# Altium PCB 下层功率板.PcbDoc
Units mm, origin at the board's own origin, x right, y up, seen from the top; angles counter-clockwise.
Board outline 70 x 50 mm, 2 copper layers (Top Layer, Bottom Layer); 12 components, 4 nets, 48 pads, 0 vias.
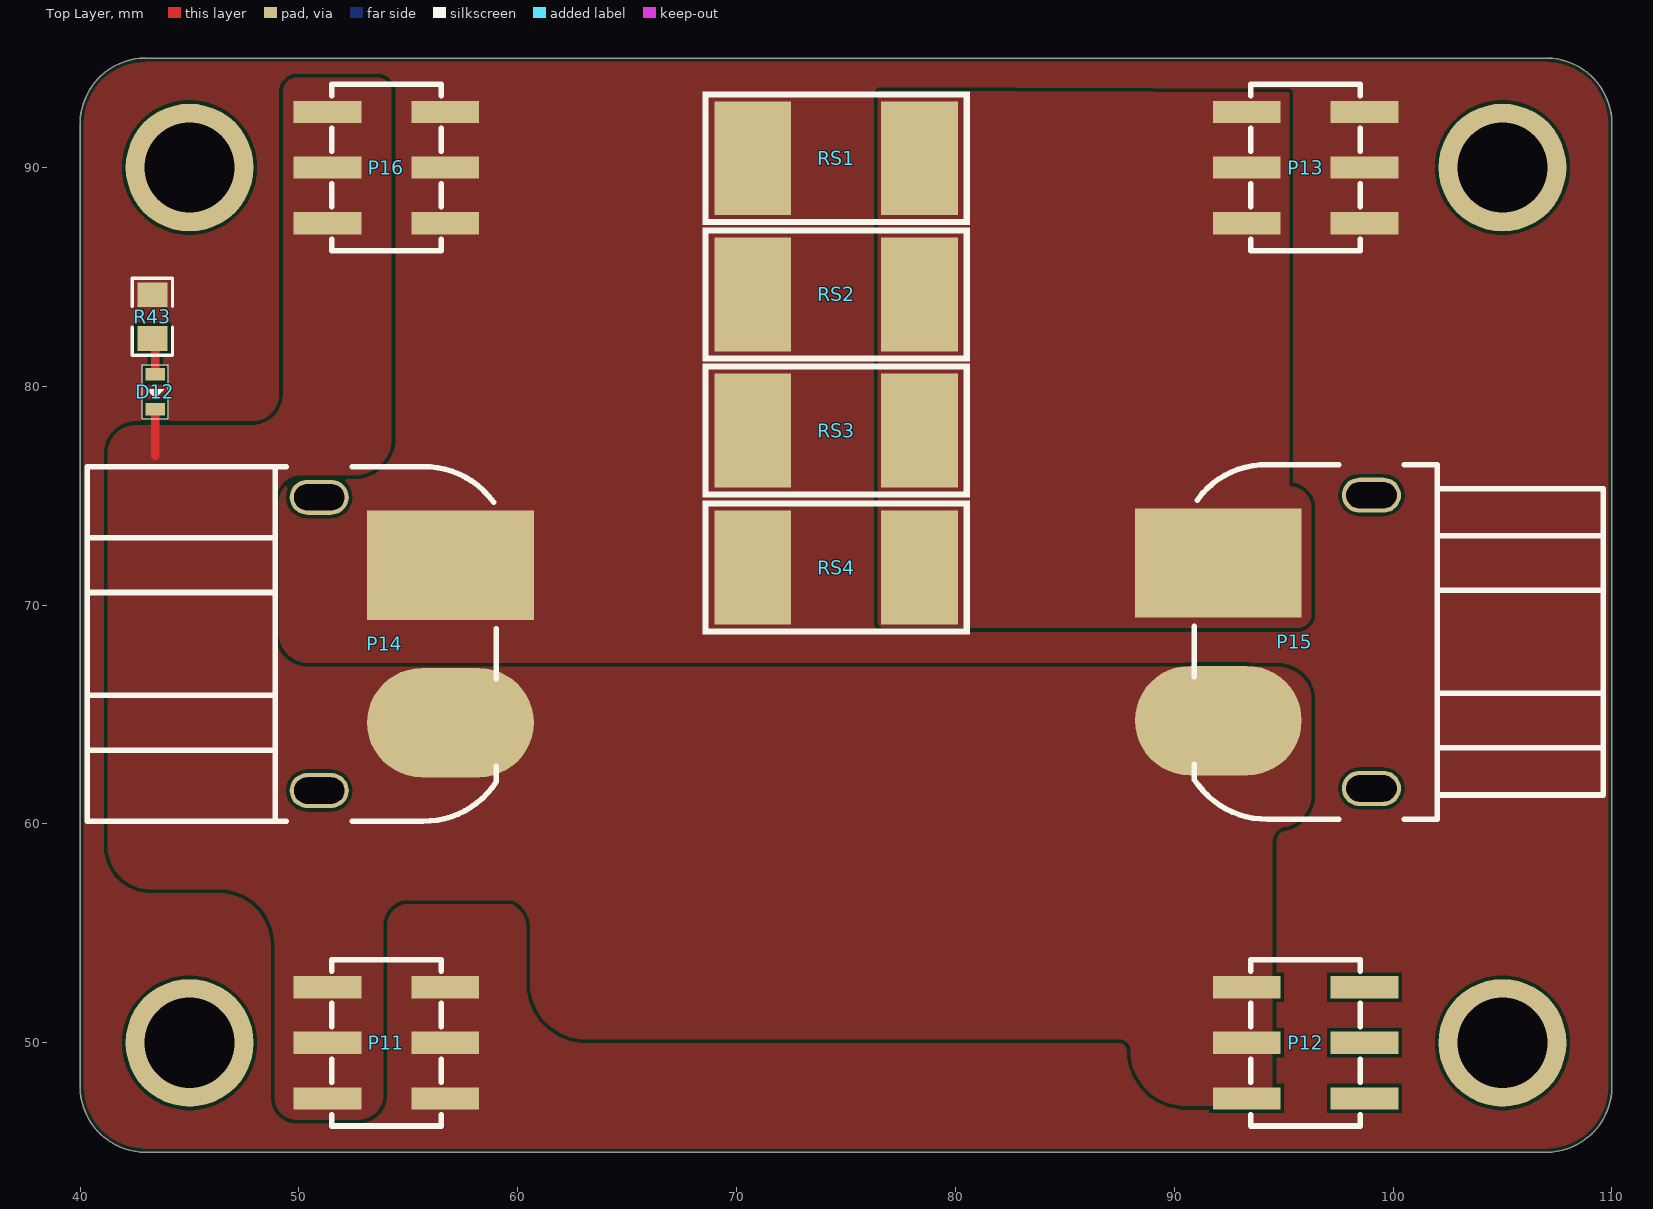
[diagram p0: Top Layer view]
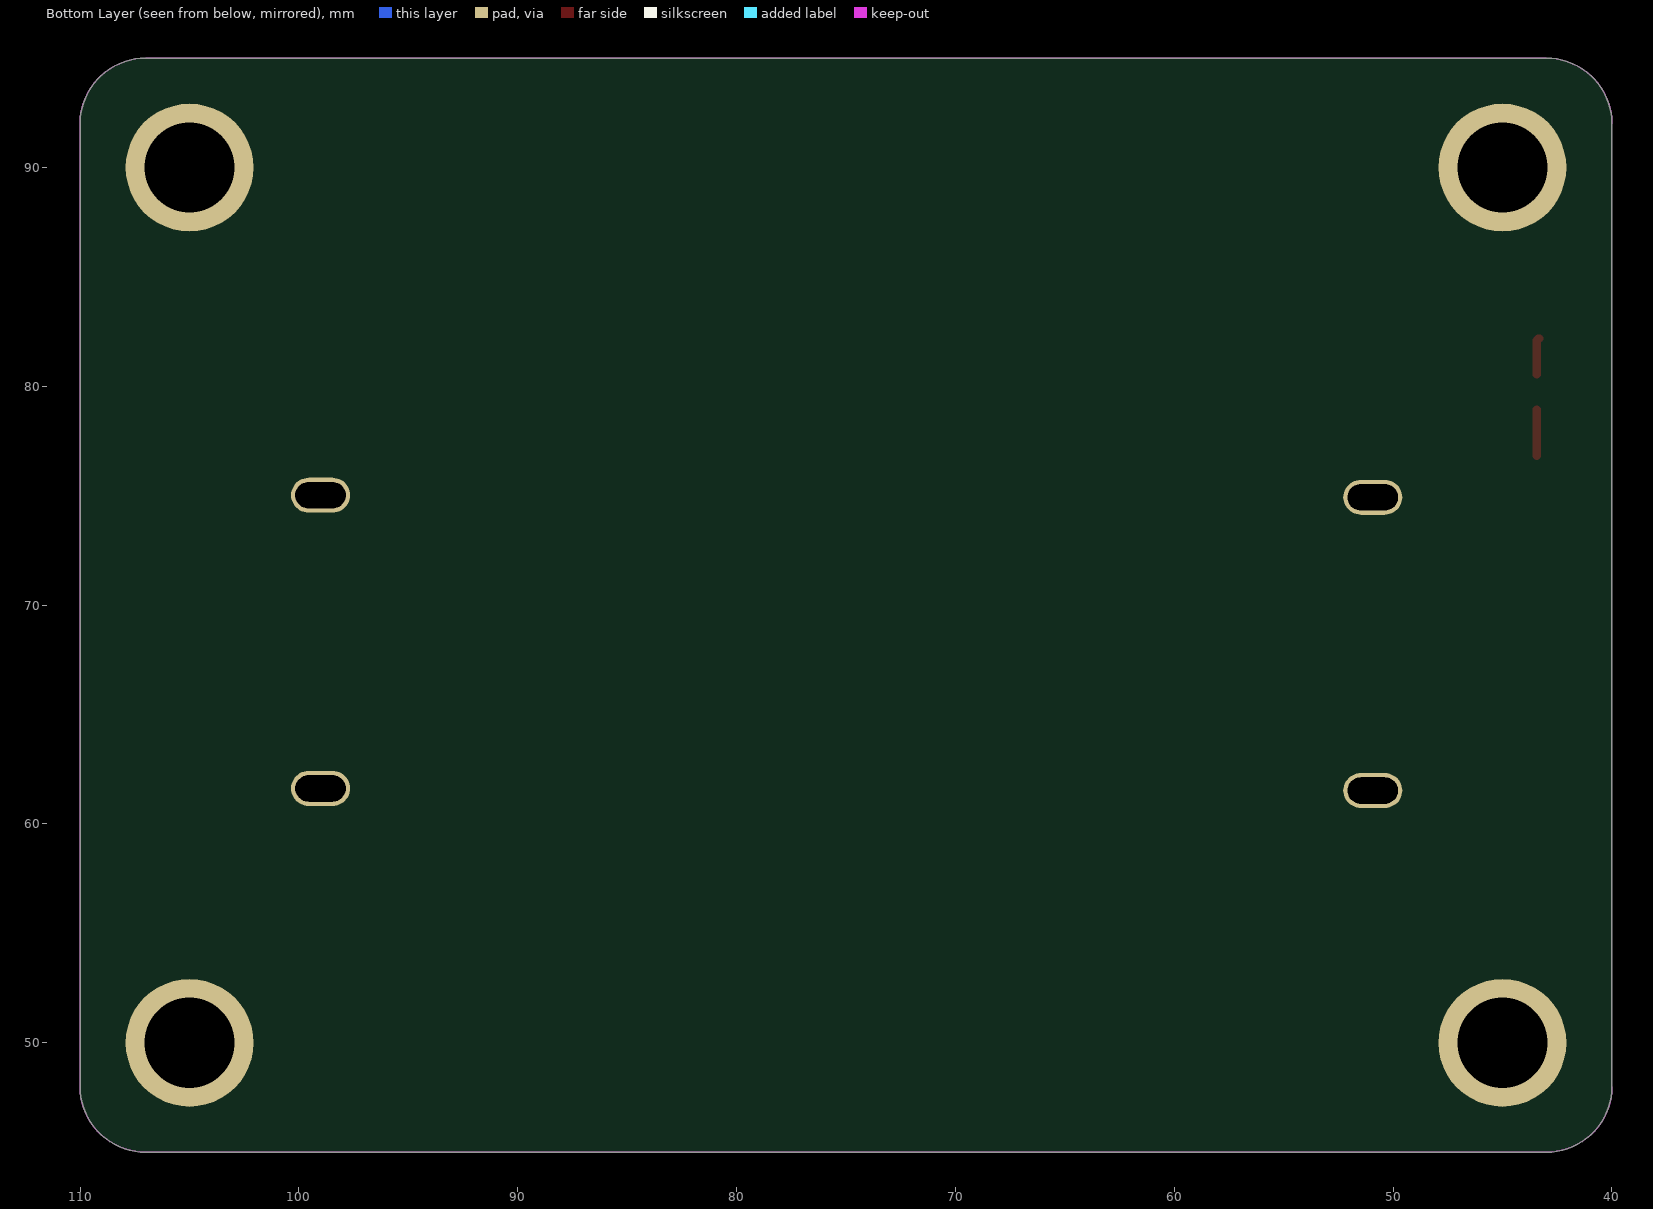
[diagram p1: Bottom Layer view, seen from below]
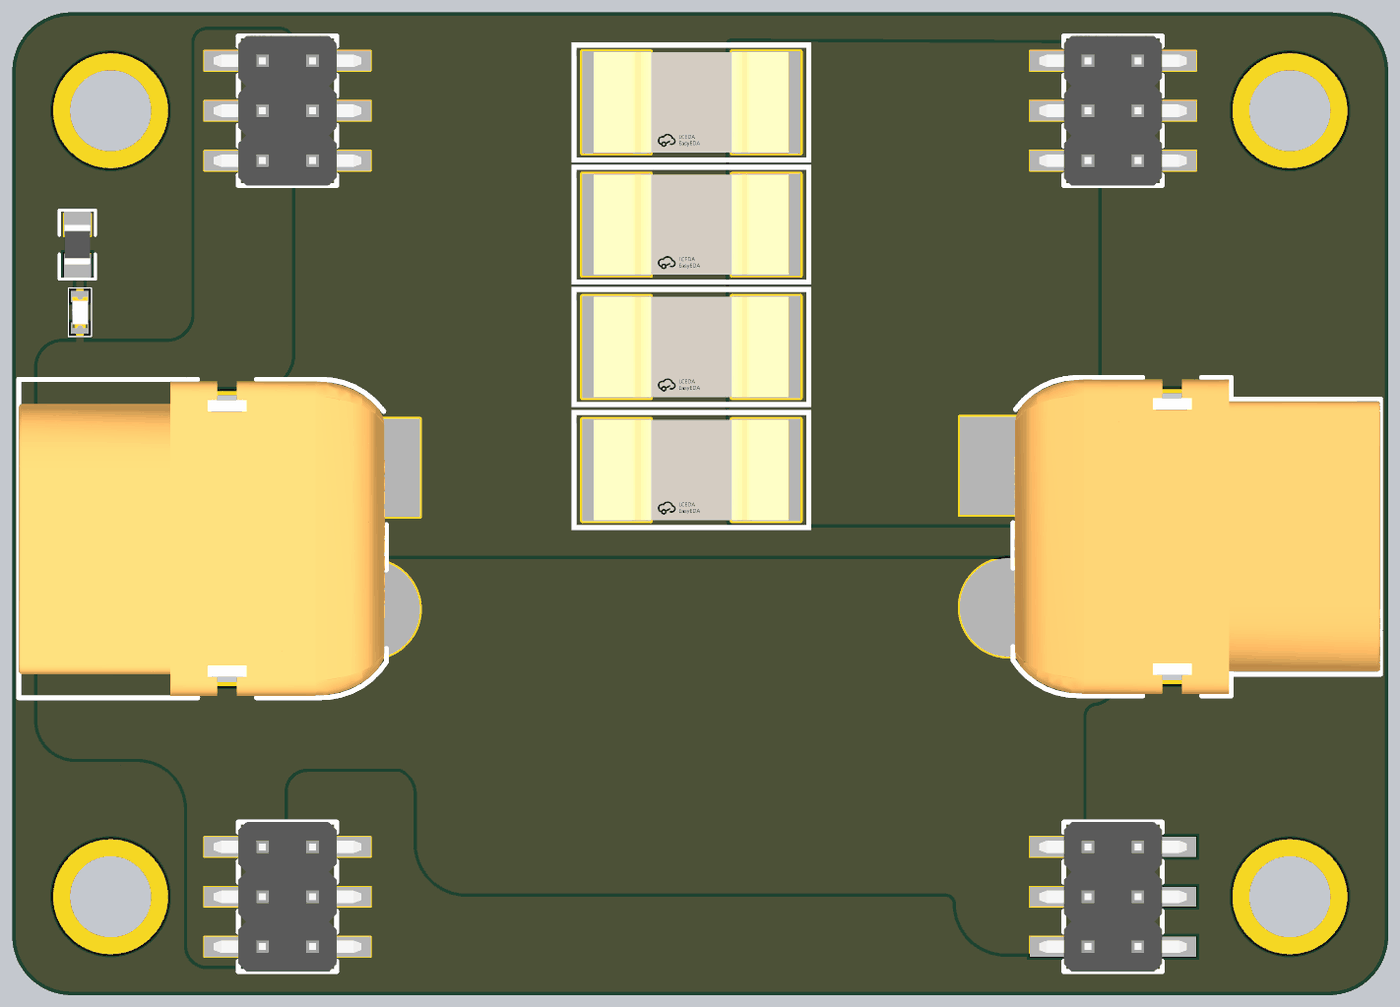
[diagram p2: 3D render of the assembled board from above, using the file's embedded part models]

## Layer stack, top to bottom
Top Solder: solder mask 0.0102, Solder Resist, Dk 3.5
Top Layer: signal copper 0.0356
Dielectric 1: dielectric 0.32, FR-4, Dk 4.8
Bottom Layer: signal copper 0.0356
Bottom Solder: solder mask 0.0102, Solder Resist, Dk 3.5

## Board outline
40,48 40,92 cw(c43,92) 43,95 107,95 cw(c107,92) 110,92 110,48 cw(c107,48) 107,45 43,45 cw(c43,48)

## Design rules (kind name [scope] priority, off if disabled: settings)
Clearance [All] p1: gap=0.152 ignorepadtopadclearanceinfootprint=FALSE except(0: Arc-Hole Track-Hole SMDPad-Hole THPad-Hole Via-Hole Fill-Hole Poly-Hole Region-Hole Text-Hole)
ComponentClearance [All] p1: gap=0 collisioncheckmode=3 verticalgap=0 showdistances=FALSE
HoleSize [All] p1: absolutevalues=TRUE maxlimit=12.7 minlimit=0.025 maxpercent=80.000 minpercent=20.000
HoleToHoleClearance [All] p1: gap=0 allowstackedmicrovias=TRUE
MinimumSolderMaskSliver [All] p1: minsoldermaskwidth=0
PolygonConnect [All] p1: connectstyle=Direct reliefconductorwidth=0.254 reliefentries=4 polygonreliefangle="90 Angle" airgapwidth=0.254
RoutingVias [All] p1: holewidth=0.711 width=1.27 viastyle="Through Hole" minholewidth=0.711 minwidth=1.27 maxholewidth=0.711 maxwidth=1.27
SilkToSilkClearance [All] p1: silktosilkclearance=0
SilkToSolderMaskClearance [IsPad] p1: minsilkscreentomaskgap=0 clearancetoexposedcopper=TRUE
SolderMaskExpansion [All] p1: expansion=0.102 istentingtop=FALSE
Width [All] p1: maxlimit=12.7 minlimit=0.203 preferedwidth=0.508 minimp=50.000000 maximp=50.000000 favimp=50.000000
24 further rules are at their usual default settings.

## Components (designator, comment, footprint, x,y, rotation, side; value= is the part's Value field where it differs from the comment)
D12 "LED_BLUE" LED-0603W 43.307,79.883 r270 top
P11 "Header 3X2" HDR-SMD_6P-P2.54-V-M-R2-C3-LS7.5-2 54,50 r90 top locked
P12 "Header 3X2" HDR-SMD_6P-P2.54-V-M-R2-C3-LS7.5-2 96,50 r90 top locked
P13 "Header 3X2" HDR-SMD_6P-P2.54-V-M-R2-C3-LS7.5-2 96,90 r90 top locked
P14 "C98732" "XT60 PT M" 53.927,68.23 r270 top
P15 "C428722" "XT60 PT F" 96.012,68.326 r90 top
P16 "Header 3X2" HDR-SMD_6P-P2.54-V-M-R2-C3-LS7.5-2 54,90 r90 top locked
R43 "100K" R0805 43.307,83.185 r90 top
RS1 "HolRS3920-5W-0.3mR-1%" R3920 74.549,90.424 r0 top value=0.3mΩ
RS2 "HolRS3920-5W-0.3mR-1%" R3920 74.549,84.201 r0 top value=0.3mΩ
RS3 "HolRS3920-5W-0.3mR-1%" R3920 74.549,77.978 r0 top value=0.3mΩ
RS4 "HolRS3920-5W-0.3mR-1%" R3920 74.549,71.717 r0 top value=0.3mΩ

## Footprints (in the part's own frame and the unit in brackets; to place one, negate y for a bottom-side part, rotate by r counter-clockwise, add the part's x,y. Pads: shape width x height; smd on the part's side, far side on the other; paste and mask are expansions set on the pad)
HDR-SMD_6P-P2.54-V-M-R2-C3-LS7.5-2 [mm]
  rect 1.02x3.1 smd paste+0 mask+0.05: 1(-2.54,-2.69) 2(-2.54,2.69) 3(0,-2.69) 4(0,2.69) 5(2.54,-2.69) 6(2.54,2.69)
  silkscreen extent -3.8,-2.5 3.8,2.5, body extent -3.81,-3.75 3.82,3.75, height 9.19
LED-0603W [mil]
  rect 22.44x35 smd: 1(-26,5) 2(37,5)
  silkscreen extent -43,-18 54,28, body extent -25,-10 37,22, height 24
R0805 [mm]
  rect 1.133x1.377 smd paste-100 mask+0.051: 1(-1,0) 2(1,0)
  silkscreen extent -1.76,-0.92 1.76,0.92, body extent -1,-0.65 1,0.65, height 0.61
R3920 [mm]
  rect 3.5x5.2 smd: 1(-3.81,0) 2(3.81,0)
  silkscreen extent -6.1,-3.05 6.1,3.05, body extent -4.96,-2.55 4.96,2.55, height 1.06
"XT60 PT F" [mm]
  oval 1.6x2.7 hole 1.2 slot 2.3 at 90 deg: 0(-6.7,-3) 0(6.7,-3)
  rect 5x7.62 smd: 1(3.6,3.997)
  oval 5x7.62 smd: 2(-3.6,3.997)
  silkscreen extent -8.1,-13.6 8.1,5.1, body extent -8,-13.6 8,5.02, height 8.65
"XT60 PT M" [mm]
  oval 1.6x2.7 hole 1.2 slot 2.3 at 90 deg: 0(-6.7,-3) 0(6.7,-3)
  rect 5x7.62 smd: 1(-3.6,2.997)
  oval 5x7.62 smd: 2(3.6,2.997)
  silkscreen extent -8.1,-13.6 8.1,5.1, body extent -8,-13.6 8,5.02, height 8.65

## Part data
D12: library part LED, "Typical INFRARED GaAs LED", LatestRevisionDate=08-Jul-2005, LatestRevisionNote="Mech Layer 1 removed.", PackageDescription="LED; 2 Leads", PackageReference=LED-0, Published=8-Jun-2000, Publisher="Altium Limited"
P11 P12 P13 P16: "Header, 3-Pin, Dual row / PZ127-2-03-S / C3975186", LatestRevisionDate=17-Jul-2002, LatestRevisionNote="Re-released for DXP Platform.", Publisher="Altium Limited"
P14: library part P_PW_XT60_M_卧式, "XT60_PW_M / XT60公头输入"
P15: library part P_PW_XT60_FM_卧式, "XT60_PW_M / XT60母头输入"
R43: library part Res, "Resistor", LatestRevisionDate=17-Jul-2002, LatestRevisionNote="Re-released for DXP Platform.", PackageReference=AXIAL-0.4, Published=8-Jun-2000, Publisher="Altium Limited"
RS1 RS2 RS3 RS4: library part C558626, JLCPCB Part Class="Extended Part", LCSC Part Name="0.3mΩ ±1% 5W", Manufacturer=Milliohm(毫欧), Power(Watts)=5W, Tolerance=±1%, Add into BOM=yes, Convert to PCB=yes, Datasheet=https://atta.szlcsc.com/upload/public/pdf/source/20200522/C558625_7915B34B9186274EB7EA9862EBA9CEA8.pdf, Device=HolRS3920-5W-0.3mR-1%, Manufacturer Part=HolRS3920-5W-0.3mR-1%, Name=0.3mΩ, Supplier=LCSC, Supplier Footprint=3920, Supplier Part=C558626, Symbol=HOLRS3920-5W-0.3MR-1%

## Free pads (board coordinates)
  round 5.842 hole 4.13: 0(45,50) 0(45,90) 0(105,50) 0(105,90)

## Nets (pads, with @x,y where several pads share a name; then routed paths per layer and width w, separated by ;. In a path a pad name is that pad's centre, name@x,y a point inside that pad or via, vN(x,y) a via of type N, cw(c..) or ccw(c..) an arc to the next point about the centre after c; other vN are vias at no path point)
I_DIREOUT_SENSE+: P11.1 P11.3 P11.5 P13.1 P13.3 P13.5 P14.1 P16.1 P16.3 P16.5 R43.2 RS1.1 RS2.1 RS3.1 RS4.1
I_DIREOUT_SENSE-: P13.2 P13.4 P13.6 P15.1 RS1.2 RS2.2 RS3.2 RS4.2
NetD12_1: D12.1 R43.1 | length 1.7
  Top Layer w0.381: R43.1 cw(c43.307,82.058) 43.434,82.058 D12.1
VOL_IN-: D12.2 P11.2 P11.4 P11.6 P12.2 P12.4 P12.6 P14.2 P15.2 P16.2 P16.4 P16.6 | length 2.1
  Top Layer w0.381: 43.434,76.835 D12.2
pads on no net: P12.1 P12.3 P12.5 P14.0 P15.0

## Polygon pours and split planes (outlines as drawn)
I_DIREOUT_SENSE+ on Top Layer "I_DIREOUT_SENSE+_L01_P009" (solid, remove dead copper, pour order 9): 37.973,98.298 37.211,98.298 ccw(c37.211,95.758) 34.671,95.758 34.671,42.799 ccw(c37.211,42.799) 37.211,40.259 112.522,40.259 ccw(c112.522,42.799) 115.062,42.799 115.062,96.139 ccw(c112.522,96.139) 112.522,98.679 105.791,98.679
VOL_IN- on Top Layer "VOL_IN-_L01_P008" (solid, pour order 8): 54.606,67.183 94.742,67.183 cw(c94.742,65.659) 96.266,65.659 96.266,61.341 cw(c94.742,61.341) 95.19,59.884 ccw(c95.19,59.182) 94.488,59.182 94.488,47.752 cw(c93.853,47.752) 93.853,47.117 90.551,47.117 cw(c90.551,49.657) 88.011,49.657 ccw(c87.503,49.657) 87.503,50.165 63.119,50.165 cw(c63.119,52.705) 60.579,52.705 60.579,55.245 ccw(c59.182,55.245) 59.182,56.642 55.499,56.642 cw(c55.499,59.182) 52.959,59.182 52.959,65.536 cw(c54.606,65.536)
VOL_IN- on Top Layer "VOL_IN-_L01_P005" (solid, pour order 5): 41.275,58.969 ccw(c43.221,58.969) 43.221,57.023 46.355,57.023 cw(c46.355,54.483) 48.895,54.483 48.895,47.498 ccw(c49.911,47.498) 49.911,46.482 52.705,46.482 ccw(c52.705,47.625) 53.848,47.625 53.848,55.372 cw(c54.991,55.372) 54.991,56.515 59.8,56.515 cw(c59.8,54.732) 61.583,54.732 ccw(c61.959,54.732) 61.959,54.356 64.008,54.356 ccw(c64.008,56.388) 66.04,56.388 66.04,63.5 ccw(c64.262,63.5) 64.262,65.278 42.926,65.278 ccw(c42.926,63.627) 41.275,63.627 41.275,61.087
VOL_IN- on Top Layer "VOL_IN-_L01_P004" (solid, pour order 4): 49.911,94.107 ccw(c49.911,93.472) 49.276,93.472 49.276,79.629 cw(c47.879,79.629) 47.879,78.232 42.545,78.232 ccw(c42.545,76.962) 41.275,76.962 41.275,59.182 ccw(c43.434,59.182) 43.434,57.023 54.447,57.023 ccw(c54.447,59.472) 56.896,59.472 56.896,64.643 ccw(c54.356,64.643) 54.356,67.183 50.419,67.183 cw(c50.419,68.707) 48.895,68.707 48.895,74.676 cw(c50.165,74.676) 50.165,75.946 52.578,75.946 ccw(c52.578,77.597) 54.229,77.597 54.229,93.472 ccw(c53.594,93.472) 53.594,94.107
I_DIREOUT_SENSE- on Top Layer "I_DIREOUT_SENSE-_L01_P001" (solid, pour order 1): 76.454,93.513 76.454,69.215 ccw(c76.708,69.215) 76.708,68.961 95.631,68.961 ccw(c95.631,69.596) 96.266,69.596 96.266,74.422 ccw(c95.25,74.422) 95.25,75.438 95.25,93.431
I_DIREOUT_SENSE+ on Top Layer "I_DIREOUT_SENSE+_L01_P000" (solid, pour order 0): 54.184,75.027 53.31,75.027 ccw(c53.31,74.549) 52.832,74.549 52.832,69.596 ccw(c53.594,69.596) 53.594,68.834 72.771,68.834 ccw(c72.771,69.469) 73.406,69.469 73.406,93.853 ccw(c72.898,93.853) 72.898,94.361 54.483,94.361 54.483,75.03

## Keep-outs
Keep-Out Layer:
  the board outline again, w0.025

## Silkscreen, mask and mechanical layers (free items; w line width, h text height)
Mechanical 1:
  the board outline again, w0.254